# Altium PCB LED7 SEGMENT.PcbDoc
Units mm, origin at the board's own origin, x right, y up, seen from the top; angles counter-clockwise.
Board outline 28 x 15 mm, 2 copper layers (Top Layer, Bottom Layer), stack 1.671 mm thick; 2 components, 16 nets, 36 pads, 0 vias.
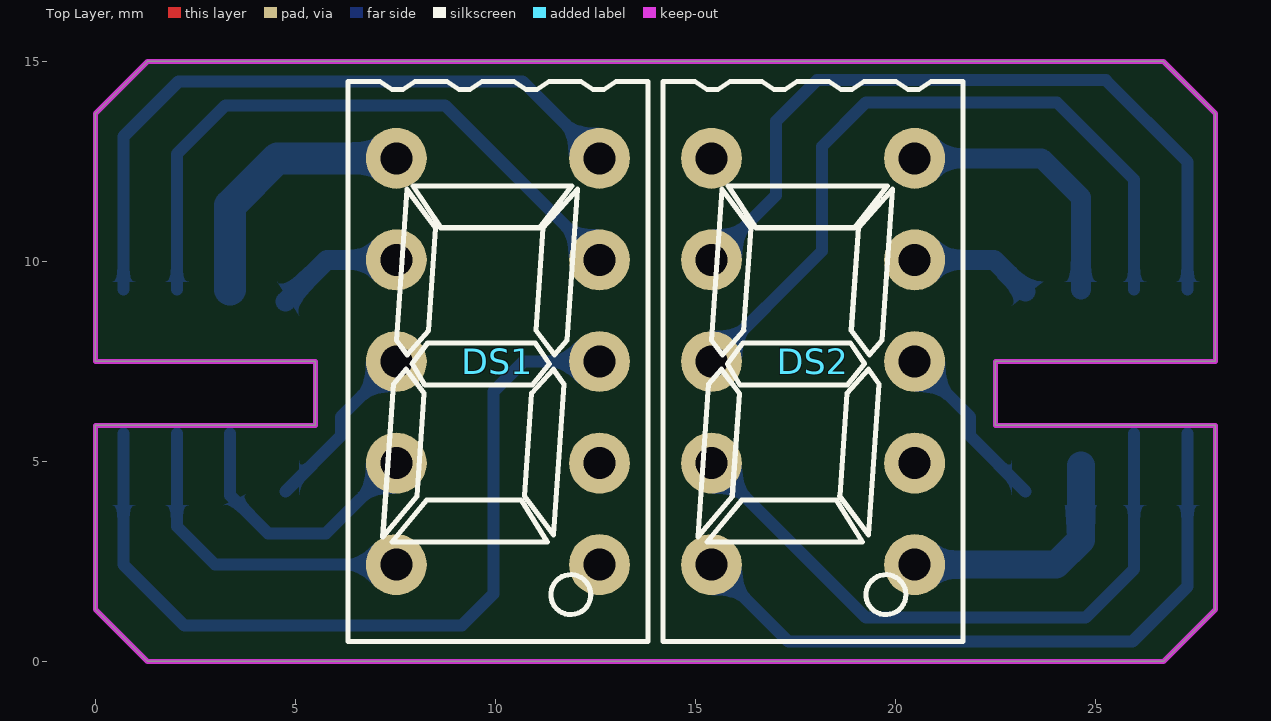
[diagram p0: Top Layer view]
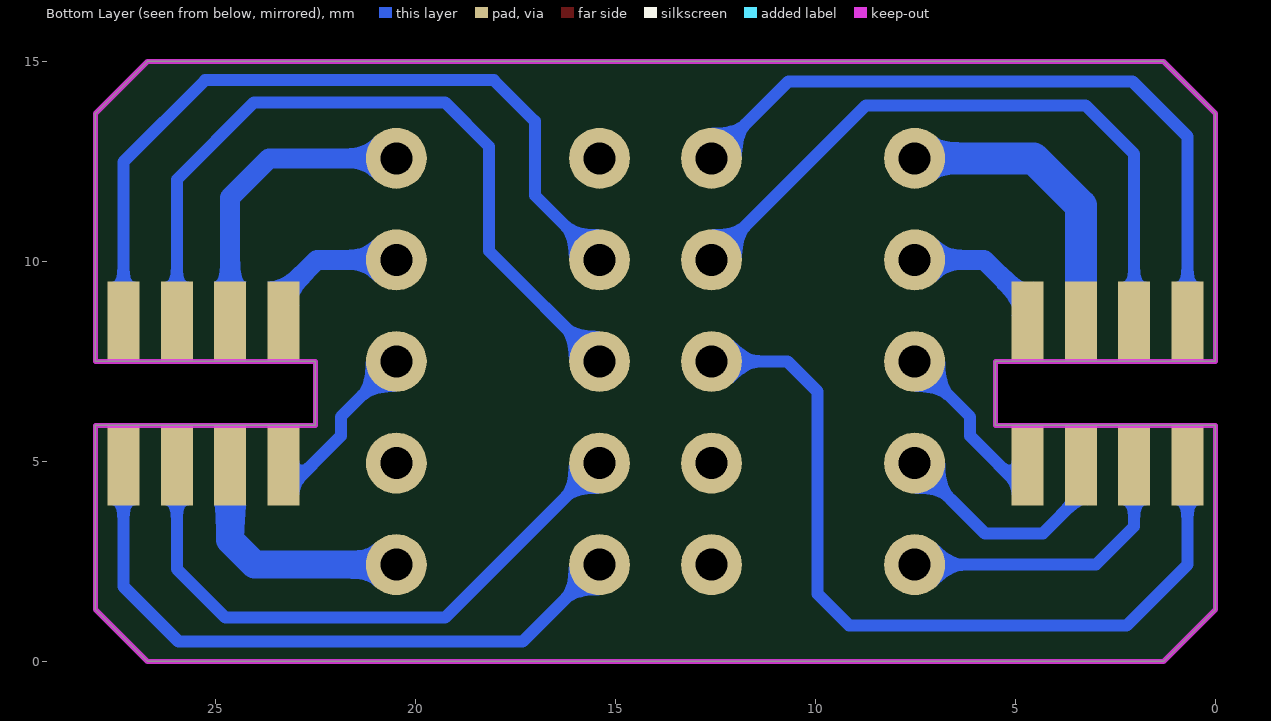
[diagram p1: Bottom Layer view, seen from below]

## Layer stack, top to bottom
Top Solder: solder mask 0.0102, Solder Resist, Dk 3.5
Top Layer: signal copper 0.0356
Dielectric 1: dielectric 1.6, FR-4, Dk 4.8
Bottom Layer: signal copper 0.0356
Bottom Solder: solder mask 0.0102, Solder Resist, Dk 3.5

## Board outline
0,1.299 1.3,-0.001 26.7,-0.001 28,1.299 28,5.899 22.5,5.899 22.5,7.499 28,7.499 28,13.699 26.7,14.999 1.3,14.999 0,13.699 0,7.499 5.5,7.499 5.5,5.899 0,5.899

## Design rules (kind name [scope] priority, off if disabled: settings)
Clearance [All] p1: gap=0.254
PolygonConnect [All] p1: connectstyle=Relief reliefconductorwidth=0.254 reliefentries=4 polygonreliefangle="90 Angle" airgapwidth=0.254
RoutingLayers [All] p1: top layer_v5=FALSE bottom layer_v5=TRUE
RoutingVias [All] p1: holewidth=0.711 width=1.27 viastyle="Through Hole" minholewidth=0.711 minwidth=1.27 maxholewidth=0.711 maxwidth=1.27
SolderMaskExpansion [All] p1: expansion=0.102
Width [All] p1: maxlimit=254 minlimit=0.254 preferedwidth=0.254
29 further rules are at their usual default settings.

## Components (designator, comment, footprint, x,y, rotation, side; value= is the part's Value field where it differs from the comment)
DS1 "Dpy Red-CA" 7SEG-HY-A3613SR 10.06,7.499 r0 top
DS2 "Dpy Red-CA" 7SEG-HY-A3613SR 17.94,7.499 r0 top

## Footprints (in the part's own frame and the unit in brackets; to place one, negate y for a bottom-side part, rotate by r counter-clockwise, add the part's x,y. Pads: shape width x height; smd on the part's side, far side on the other; paste and mask are expansions set on the pad)
7SEG-HY-A3613SR [mil]
  round 60 hole 31.5: 1(-100,200) 2(-100,100) 3(-100,0) 4(-100,-100) 5(-100,-200) 6(100,-200) 7(100,-100) 8(100,0) 9(100,100) 10(100,200)
  silkscreen extent -148,-276 148,276, body extent -148,-276 148,276, height 315

## Part data
DS1 DS2: "7.62 mm Black Surface HER 7-Segment Display: CA, RH DP"

## Free pads (board coordinates)
  rect 0.8x2 smd far side: 0(0.7,4.899) 0(0.7,8.499) 0(27.3,4.899) 0(27.3,8.499) 1(2.033,4.899) 1(2.033,8.499) 1(25.967,4.899) 1(25.967,8.499) 2(3.367,4.899) 2(3.367,8.499) 2(4.7,4.899) 2(4.7,8.499) 2(23.3,4.899) 2(23.3,8.499) 2(24.633,4.899) 2(24.633,8.499)

## Nets (pads, with @x,y where several pads share a name; then routed paths per layer and width w, separated by ;. In a path a pad name is that pad's centre, name@x,y a point inside that pad or via, vN(x,y) a via of type N, cw(c..) or ccw(c..) an arc to the next point about the centre after c; other vN are vias at no path point)
A1: DS1.10 pad.0@0.7,8.499 | length 17.1
  Bottom Layer w0.3: pad.0@0.7,9.299 0.7,13.124 2.075,14.499 10.68,14.499 DS1.10
A2: DS2.10 pad.2@24.633,8.499 | length 6.9
  Bottom Layer w0.5: DS2.10 23.656,12.579 24.633,11.602 pad.2@24.633,9.299
B1: DS1.9 pad.1@2.033,8.499 | length 16.1
  Bottom Layer w0.3: pad.1@2.033,9.299 2.033,12.687 3.245,13.899 8.74,13.899 DS1.9
B2: DS2.9 pad.2@23.3,8.499 | length 3.1
  Bottom Layer w0.5: DS2.9 22.461,10.039 pad.2@23.25,9.25
C1: DS1.8 pad.0@0.7,4.899 | length 21.5
  Bottom Layer w0.3: pad.0@0.7,5.699 0.7,2.42 2.221,0.899 9.16,0.899 9.95,1.689 9.95,6.749 10.7,7.499 DS1.8
C2: DS2.8 pad.2@23.3,4.899 | length 4.4
  Bottom Layer w0.3: DS2.8 21.865,6.114 21.865,5.635 pad.2@23.25,4.25
COM1: DS1.1 pad.2@3.367,8.499 | length 6.7
  Bottom Layer w0.8: pad.2@3.367,9.299 3.367,11.399 4.547,12.579 DS1.1
COM2: DS2.6 pad.2@24.633,4.899 | length 6.3
  Bottom Layer w0.7: DS2.6 24.019,2.419 24.633,3.033 pad.2@24.633,4.899
D1: DS1.5 pad.1@2.033,4.899 | length 8.2
  Bottom Layer w0.3: pad.1@2.033,5.699 2.033,3.379 2.993,2.419 DS1.5
D2: DS2.5 pad.0@27.3,4.899 | length 17.1
  Bottom Layer w0.3: DS2.5 17.32,0.499 25.925,0.499 27.3,1.874 pad.0@27.3,5.699
E1: DS1.4 pad.2@3.367,4.899 | length 6.8
  Bottom Layer w0.3: pad.2@3.367,5.699 3.367,4.149 4.316,3.2 5.761,3.2 DS1.4
E2: DS2.4 pad.1@25.967,4.899 | length 16.1
  Bottom Layer w0.3: DS2.4 19.26,1.099 24.755,1.099 25.967,2.311 pad.1@25.967,5.699
F1: DS1.2 pad.2@4.7,8.499 | length 3.2
  Bottom Layer w0.5: pad.2@4.75,9 5.789,10.039 DS1.2
F2: DS2.2 pad.0@27.3,8.499 | length 18.9
  Bottom Layer w0.3: DS2.2 17.014,11.653 17.014,13.506 18.039,14.532 25.259,14.532 27.3,12.491 pad.0@27.3,9.299
G1: DS1.3 pad.2@4.7,4.899 | length 4.4
  Bottom Layer w0.3: pad.2@4.75,4.25 6.135,5.635 6.135,6.114 DS1.3
G2: DS2.3 pad.1@25.967,8.499 | length 18.3
  Bottom Layer w0.3: DS2.3 18.157,10.256 18.157,12.871 19.263,13.978 24.035,13.978 25.967,12.046 pad.1@25.967,9.299
pads on no net: DS1.6 DS1.7 DS2.1 DS2.7

## Keep-outs
Keep-Out Layer:
  the board outline again, w0.127